# Altium PCB em32f103cb.PcbDoc
Units mm, origin at the board's own origin, x right, y up, seen from the top; angles counter-clockwise.
Board outline 37 x 30 mm, 2 copper layers (Top Layer, Bottom Layer); 44 components, 60 nets, 187 pads, 34 vias.
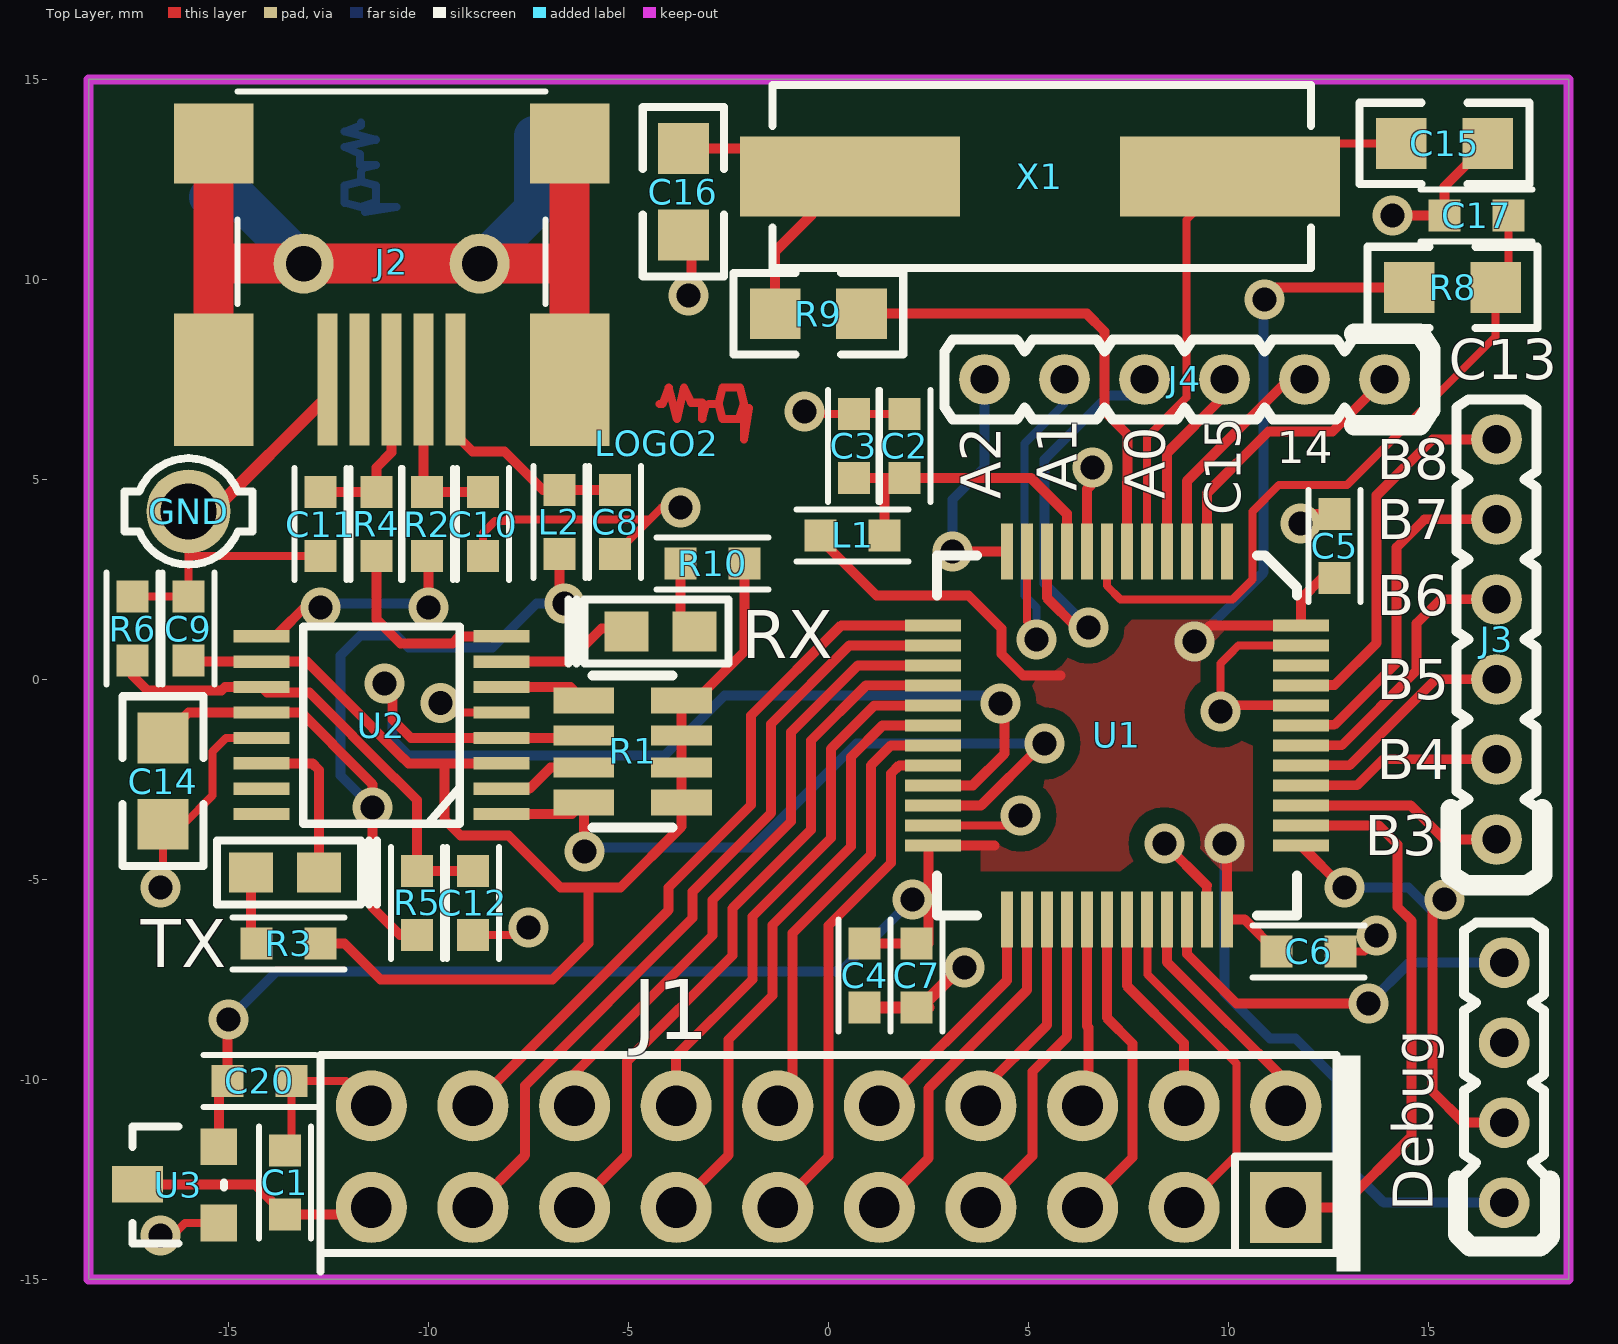
[diagram p0: Top Layer view]
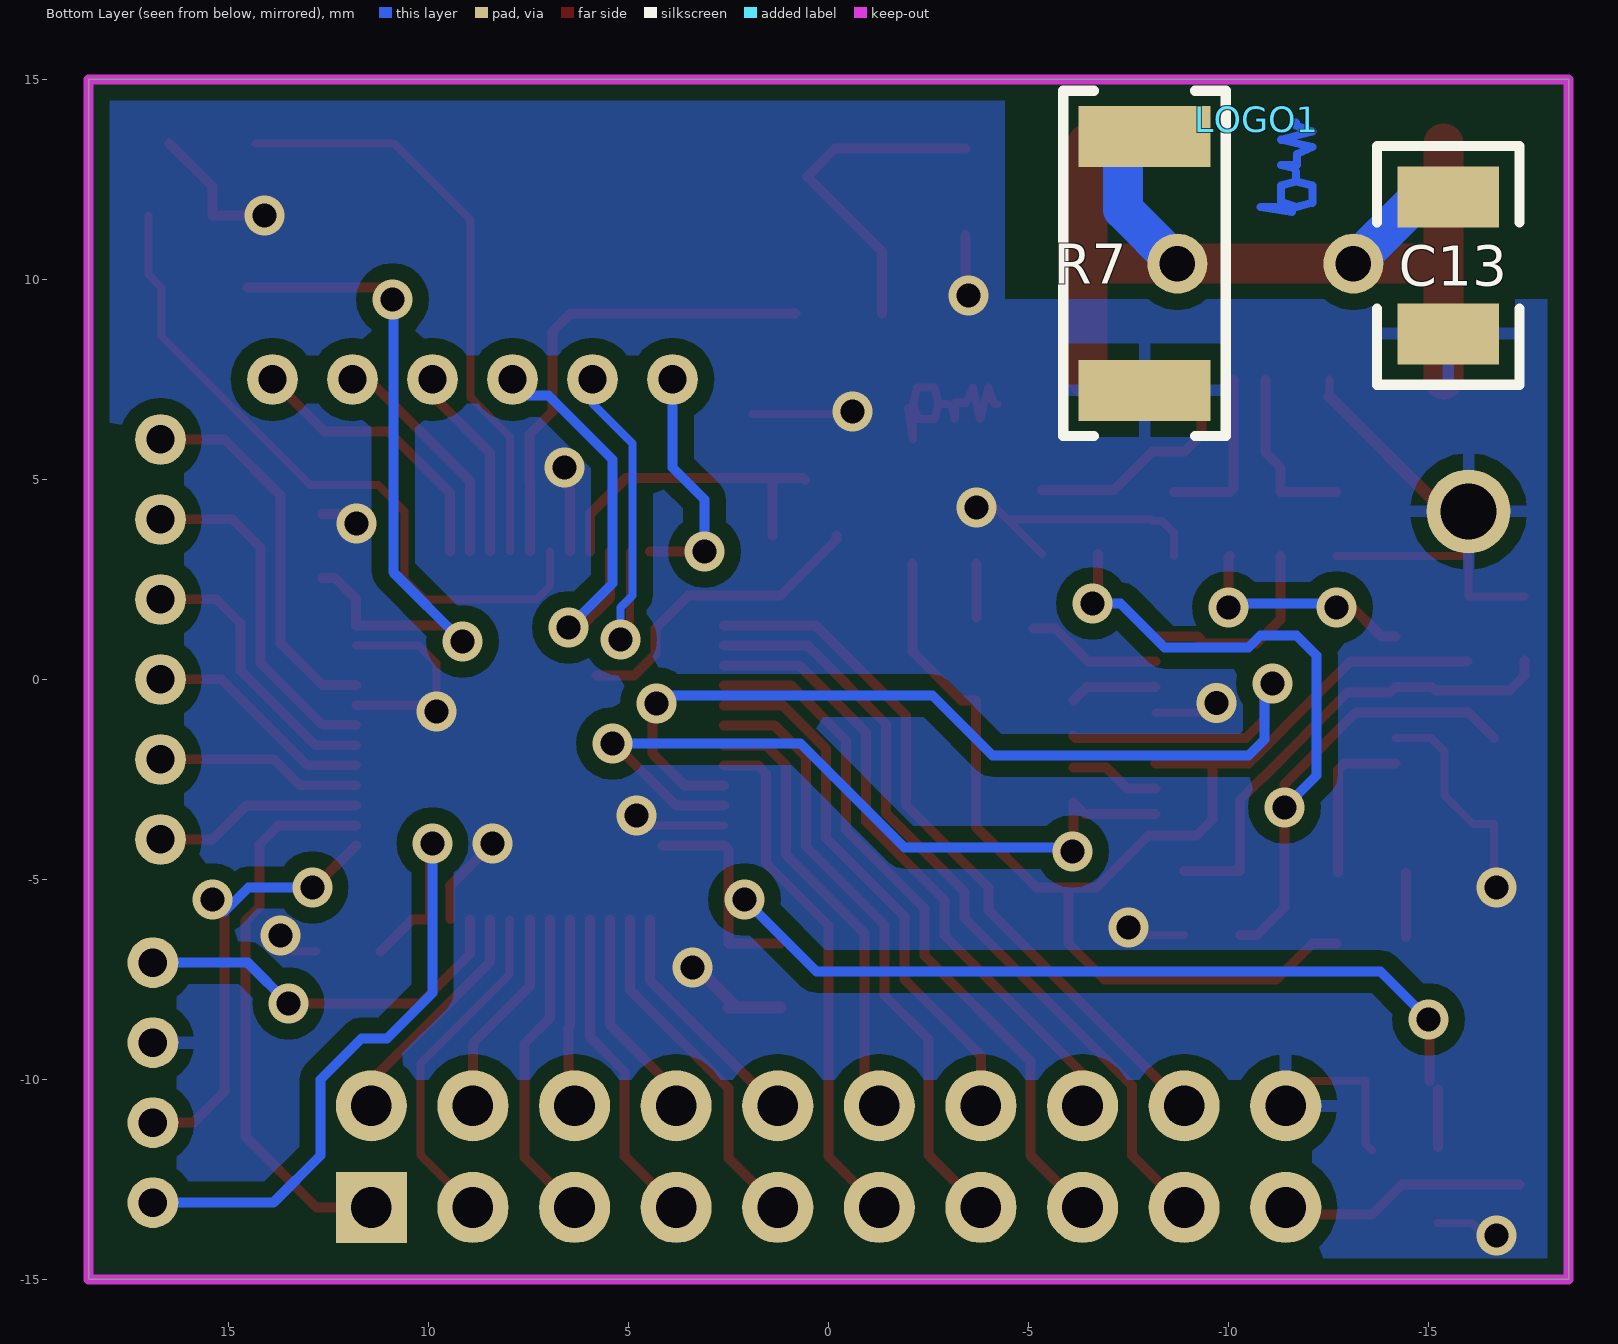
[diagram p1: Bottom Layer view, seen from below]

## Layer stack, top to bottom
Top Layer: signal copper 0.0356
Dielectric: dielectric 0.32, FR-4, Dk 4.8
Bottom Layer: signal copper 0.0356

## Board outline
-18.5,-15 -18.5,15 18.5,15 18.5,-15

## Design rules (kind name [scope] priority, off if disabled: settings)
Clearance InPolyClearance [InPoly] p1: gap=0.4
Clearance Tracks-PadsClearance [IsTrack vs IsPad] p2: gap=0.22
Clearance TracksClearance [All vs IsTrack] p3: gap=0.25
Clearance [All] p4: gap=0.2
ComponentClearance [All] p1 off: gap=0.254 collisioncheckmode=3 verticalgap=0.254 showdistances=FALSE
Height [All] p1: minheight=0 maxheight=40 prefheight=12.7
HoleSize [All] p1: absolutevalues=TRUE maxlimit=6 minlimit=0.025 maxpercent=80.000 minpercent=20.000
MinimumSolderMaskSliver [not(IsComponentPrimitive and OnSolderMask)] p1: minsoldermaskwidth=0.1
PolygonConnect PolygonConnectDirect [IsVia] p1: connectstyle=Direct reliefconductorwidth=0.254 reliefentries=4 polygonreliefangle="90 Angle"
PolygonConnect PolygonConnectElse [All] p2: connectstyle=Relief reliefconductorwidth=0.3 reliefentries=4 polygonreliefangle="90 Angle"
RoutingVias [All] p1: holewidth=0.6 width=1.1 viastyle="Through Hole" minholewidth=0.5 minwidth=1 maxholewidth=2 maxwidth=4
SilkToSilkClearance [All] p1 off: silktosilkclearance=0.254
SilkscreenOverComponentPads [All] p1: minsilkscreentomaskgap=0.1
SolderMaskExpansion [All] p1: expansion=0.102
Width [All] p1: maxlimit=4 minlimit=0.2 preferedwidth=0.3
22 further rules are at their usual default settings.

## Components (designator, comment, footprint, x,y, rotation, side; value= is the part's Value field where it differs from the comment)
C1 "CL10B105KO8NNNC" 0603-IPC -13.589,-12.573 r90 top
C2 "CL10B105KO8NNNC" 0603-IPC 1.905,5.842 r90 top
C3 "06035C103KAT2A" 0603-IPC 0.635,5.842 r90 top
C4 "CL10B105KO8NNNC" 0603-IPC 0.9,-7.4 r270 top
C5 "CL10B104JB8NNNC" 0603-IPC 12.654,3.338 r90 top
C6 "CL10B104JB8NNNC" 0603-IPC 12,-6.8 r0 top
C7 "CL10B104JB8NNNC" 0603-IPC 2.2,-7.4 r270 top
C8 "06035C103KAT2A" 0603-IPC -5.334,3.937 r90 top
C9 "CL10B104JB8NNNC" 0603-IPC -16.002,1.27 r270 top
C10 "CC0603JRNPO9BN470" 0603-IPC -8.636,3.883 r270 top
C11 "CC0603JRNPO9BN470" 0603-IPC -12.7,3.883 r270 top
C12 "06035C103KAT2A" 0603-IPC -8.89,-5.588 r90 top
C13 "MCCA000836" 1210 -15.494,12.065 r270 bottom
C14 "0805YC475KAT2A" 0805 -16.637,-2.54 r270 top
C15 "CL21C220JBANNNC" 0805 15.4,13.4 r180 top
C16 "CL21C220JBANNNC" 0805 -3.629,12.192 r90 top
C17 "CL10B104JB8NNNC" 0603-IPC 16.2,11.6 r180 top
C20 "CL10B105KO8NNNC" 0603-IPC -14.224,-10.033 r0 top
Debug "ZL303-04P" PLMS4S 16.891,-13.081 r90 top
GND "LST1506" LST1506 -16,4.2 r180 top
J1 "ZL212-20KG" PLD20R 11.43,-13.2 r180 top locked
J2 "DS1104-BN0SR" USBMS1B5 -10.922,7.493 r0 top
J3 "PLMS6S" PLMS6S 16.7,-4 r90 top
J4 "PLMS6S" PLMS6S 13.9,7.5 r180 top
L1 "BLM18AG102SN1D" 0603-IPC 0.6,3.6 r180 top
L2 "BLM18AG102SN1D" 0603-IPC -6.731,3.937 r270 top
LOGO1 "MRQ_1_8" MRQ_1_8 -10.7,14 r270 bottom
LOGO2 "MRQ_1_8" MRQ_1_8 -4.3,5.9 r0 top
R1 "4x47k" 1206RP -4.9,-1.8 r270 top
R2 "0603SAF270JT5E" 0603-IPC -10.033,3.883 r270 top
R3 "0603SAF1001T5E" 0603-IPC -13.5,-6.6 r0 top
R4 "0603SAF270JT5E" 0603-IPC -11.303,3.883 r270 top
R5 "0603WGF10KT5E" 0603-IPC -10.287,-5.588 r90 top
R6 "0603WGF15KT5E" 0603-IPC -17.399,1.27 r90 top
R7 "25121WJ 910K T5E" 2512 -7.9,10.4 r90 bottom
R8 "0805WAF 100K T5E" 0805 15.6,9.8 r0 top
R9 "0805WAF 220R T5E" 0805 -0.254,9.144 r0 top
R10 "0603SAF1001T5E" 0603-IPC -2.9,2.9 r0 top
RX "KP-1608SGC" D0603 -4.2,1.2 r180 top
TX "LED0603-RW120" D0603 -13.589,-4.826 r0 top
U1 "STM32F103CBT6" MS-026ABC 7.207,-1.397 r270 top
U2 "FT230XS" MO-137AB -11.176,-1.143 r180 top
U3 "MCP1700T3302ETT" SOT23-3 -15.24,-13.589 r90 top
X1 "8.00MHz" HC49SMP 10.033,12.573 r180 top

## Footprints (in the part's own frame and the unit in brackets; to place one, negate y for a bottom-side part, rotate by r counter-clockwise, add the part's x,y. Pads: shape width x height; smd on the part's side, far side on the other; paste and mask are expansions set on the pad)
0603-IPC [mm]
  rect 0.8x0.8 smd: 1(-0.8,0) 2(0.8,0)
  silkscreen extent -1.4,-0.65 1.4,0.65, body extent -0.8,-0.4 0.8,0.4, height 1
0805 [mil]
  rect 50x50 smd: 1(-42.5,0) 2(42.5,0)
  silkscreen extent -84,-40 84,40, body extent -39,-28 39,28, height 51
1206RP [mm]
  rect 0.65x1.524 smd: 1(-1.275,-1.219) 4(1.275,-1.219) 5(1.275,1.219) 8(-1.275,1.219)
  rect 0.5x1.524 smd: 2(-0.4,-1.219) 3(0.4,-1.219) 6(0.4,1.219) 7(-0.4,1.219)
  silkscreen extent -1.9,-1 1.9,1, body extent -1.6,-0.8 1.6,0.8, height 0.55
1210 [mil]
  rect 60x100 smd: 1(0,0) 2(135,0)
  silkscreen extent -50,-70 185,70, body extent 5,-49 130,49, height 75
2512 [mil]
  rect 60x130 smd: 1(125,0) 2(-125,0)
  silkscreen extent -170,-80 170,80, body extent -128,-63 128,63, height 26
D0603 [mm]
  rect 1.1x1 smd: ANOD(-0.85,0) CATH(0.85,0)
  silkscreen extent -1.7,-0.8 2.3,0.8, body extent -1.06,-0.7 0.94,0.7, height 1.35
HC49SMP [mm]
  rect 5.5x2 smd: 1(0,0) 2(9.5,0)
  silkscreen extent -2.03,-2.29 11.43,2.29, body extent -1.6,-2.4 11.1,2.4, height 4.2
LST1506 [mm]
  round 2.1 hole 1.4: 1(0,0)
  silkscreen extent -1.6,-1.33 1.6,1.33, body extent -1.4,-0.4 1.4,0.4, height 7
MO-137AB [mil]
  rect 55x12 smd: 1(-118,87.5) 2(-118,62.5) 3(-118,37.5) 4(-118,12.5) 5(-118,-12.5) 6(-118,-37.5) 7(-118,-62.5) 8(-118,-87.5) 9(118,-87.5) 10(118,-62.5) 11(118,-37.5) 12(118,-12.5) 13(118,12.5) 14(118,37.5) 15(118,62.5) 16(118,87.5)
  silkscreen extent -77,-97 77,97, body extent -118,-97 118,97, height 69
MRQ_1_8 [mm]
  Top Layer lines w0.203: 0.076,0.991 0.152,0.991 0.305,1.397 0.508,0.61 0.686,1.397 0.864,1.016 1.143,1.016 1.143,0.61 1.219,0.94 1.321,0.991 1.549,0.991 ; 2.311,0.889 2.184,0.102 2.184,0.991 ; 2.184,0.991 2.057,0.61 1.651,0.61 1.549,0.991 ; 2.184,0.991 2.083,1.397 1.651,1.397 1.549,0.991
MS-026ABC [mm]
  rect 1.4x0.3 smd: 1(-4.6,2.75) 2(-4.6,2.25) 3(-4.6,1.75) 4(-4.6,1.25) 5(-4.6,0.75) 6(-4.6,0.25) 7(-4.6,-0.25) 8(-4.6,-0.75) 9(-4.6,-1.25) 10(-4.6,-1.75) 11(-4.6,-2.25) 12(-4.6,-2.75) 25(4.6,-2.75) 26(4.6,-2.25) 27(4.6,-1.75) 28(4.6,-1.25) 29(4.6,-0.75) 30(4.6,-0.25) 31(4.6,0.25) 32(4.6,0.75) 33(4.6,1.25) 34(4.6,1.75) 35(4.6,2.25) 36(4.6,2.75)
  rect 0.3x1.4 smd: 13(-2.75,-4.6) 14(-2.25,-4.6) 15(-1.75,-4.6) 16(-1.25,-4.6) 17(-0.75,-4.6) 18(-0.25,-4.6) 19(0.25,-4.6) 20(0.75,-4.6) 21(1.25,-4.6) 22(1.75,-4.6) 23(2.25,-4.6) 24(2.75,-4.6) 37(2.75,4.6) 38(2.25,4.6) 39(1.75,4.6) 40(1.25,4.6) 41(0.75,4.6) 42(0.25,4.6) 43(-0.25,4.6) 44(-0.75,4.6) 45(-1.25,4.6) 46(-1.75,4.6) 47(-2.25,4.6) 48(-2.75,4.6)
  silkscreen extent -4.5,-4.5 4.5,4.5, body extent -4.6,-4.6 4.6,4.6, height 1.6
PLD20R [mil]
  rect 70x70 hole 40: 1(0,0)
  round 70 hole 40: 2(0,-100) 3(100,0) 4(100,-100) 5(200,0) 6(200,-100) 7(300,0) 8(300,-100) 9(400,0) 10(400,-100) 11(500,0) 12(500,-100) 13(600,0) 14(600,-100) 15(700,0) 16(700,-100) 17(800,0) 18(800,-100) 19(900,0) 20(900,-100)
  silkscreen extent -74,-150 950,63, body extent -50,-113 950,384, height 200
PLMS4S [mil]
  round 50 hole 28: 1(0,0) 2(78.74,0) 3(157.48,0) 4(236.22,0)
  silkscreen extent -43,-45 276,45, body extent -39,-39 276,39, height 236
PLMS6S [mil]
  round 50 hole 28: 1(0,0) 2(78.74,0) 3(157.48,0) 4(236.22,0) 5(314.96,0) 6(393.7,0)
  silkscreen extent -45,-45 433,45, body extent -39,-39 433,39, height 236
SOT23-3 [mil]
  rect 36x36 smd: 1(0,0) 2(75,0)
  rect 36x50 smd: 3(38,80)
  silkscreen extent -20,-5 95,85, body extent -22,-7 97,87, height 43
USBMS1B5 [mm]
  rect 0.5x3.3 smd: 1(1.6,0) 2(0.8,0) 3(0,0) 4(-0.8,0) 5(-1.6,0)
  rect 1.981x3.302 smd: 6(-4.45,0) 9(4.45,0)
  rect 1.981x2 smd: 7(-4.45,5.9) 8(4.45,5.9)
  round 1.5 hole 0.889: 10(-2.2,2.9) 11(2.2,2.9)
  silkscreen extent -3.85,1.9 3.85,7.21, body extent -4.95,-0.4 4.95,8.8, height 4.14

## Part data
C1 C2 C4 C20: library part CL10B105KO8NNNC[[/\]]0603[[/\]]16V[[/\]]10%[[/\]]1u/16
C3 C8 C12: library part 06035C103KAT2A[[/\]]0603[[/\]]500V[[/\]]10%[[/\]]10n/50
C5 C6 C7 C9 C17: library part CL10B104JB8NNNC[[/\]]0603[[/\]]50V[[/\]]10%[[/\]]100n/50
C10 C11: library part CC0603JRNPO9BN470[[/\]]0603[[/\]]50V[[/\]]5%[[/\]]47p/50
C13: library part MCCA000836[[/\]]1210[[/\]]1000V[[/\]]10%[[/\]]1n5/1000
C14: library part 0805YC475KAT2A[[/\]]0805[[/\]]16V[[/\]]10%[[/\]]4u7/16
C15 C16: library part CL21C220JBANNNC[[/\]]0805[[/\]]50V[[/\]]5%[[/\]]22p/50
Debug: library part ZL303-04P[[/\]]4x2mm
GND: library part LST1506[[/\]]2.8x0.8
J1: library part ZL212-20KG[[/\]]2x10x2.54
J2: library part DS1104-BN0SR[[/\]]USBMS1B5
J3 J4: library part PLMS6S[[/\]]6x2mm
L1 L2: library part BLM18AG102SN1D[[/\]]0603[[/\]]BLM18AG102SN1D
LOGO1 LOGO2: library part MRQ_1_8[[/\]]MRQLOGO
R1: library part 4D03WGJ0473T[[/\]]1206RP[[/\]]0.063W[[/\]]5%[[/\]]4x47k
R2 R4: library part 0603SAF270JT5E[[/\]]0603[[/\]]0.1W[[/\]]1%[[/\]]27R
R3 R10: library part 0603SAF1001T5E[[/\]]0603[[/\]]0.1W[[/\]]1%[[/\]]1k
R5: library part 0603WGF10KT5E[[/\]]0603[[/\]]0.1W[[/\]]1%[[/\]]10k
R6: library part 0603WGF15KT5E[[/\]]0603[[/\]]0.1W[[/\]]1%[[/\]]15k
R7: library part "25121WJ 910K T5E[[/\]]2512[[/\]]1W[[/\]]5%[[/\]]910k 5%"
R8: library part "0805WAF 100K T5E[[/\]]0805[[/\]]0.125W[[/\]]1%[[/\]]100k"
R9: library part "0805WAF 220R T5E[[/\]]0805[[/\]]0.125W[[/\]]1%[[/\]]220R"
RX: library part KP-1608SGC[[/\]]0603
TX: library part LED0603-RW120[[/\]]0603
U1: library part STM32F103CBT6[[/\]]MS-026ABC
U2: library part FT230XS[[/\]]MO-137AB
U3: library part MCP1700T3302ETT[[/\]]SOT23-3
X1: library part 8.00MHz[[/\]]HC49/4HSMX[[/\]]8.00MHz

## Via types
v1: diameter 1, hole 0.6, Top Layer to Bottom Layer, 34 vias

## Nets (pads, with @x,y where several pads share a name; then routed paths per layer and width w, separated by ;. In a path a pad name is that pad's centre, name@x,y a point inside that pad or via, vN(x,y) a via of type N, cw(c..) or ccw(c..) an arc to the next point about the centre after c; other vN are vias at no path point)
+3V3: C4.1 C5.1 C6.1 C7.1 C20.1 Debug.1 L1.2 R8.1 U1.24 U1.36 U1.48 U3.2 | length 70.6
  Top Layer w0.25: U3.2 C20.1@-15.24,-10.249 ; C20.1 -15.024,-8.524 v1(-15,-8.5) ; L1.2 -0.2,3.5 1.2,2.1 3.5,2.1 4.325,1.275 4.325,0.638 4.863,0.1 5.8,0.1 ; C4.1@1.2,-6.6 2.5,-6.6 v1@2.5,-5.5 ; v1(2.1,-5.5) v1@2.5,-5.5 ; 4.147,-4.147 U1.24 2.5,-4.254 v1@2.5,-5.5 ; v1(9.15,0.95) 9.553,1.353 U1.48 ; v1@9.957,-4.357 U1.36 10.397,-5.997 C6.1 ; v1(10.9,9.5) 11.2,9.8 R8.1 ; 10.948,1.348 11.802,1.348 U1.48 ; C5.1 12.338,2.538 11.807,2.007 U1.48
  Bottom Layer w0.25: v1(-15,-8.5) -13.8,-7.3 0.3,-7.3 v1(2.1,-5.5) ; v1(9.15,0.95) 10.88,2.68 10.88,9.48 v1(10.9,9.5) ; v1(9.9,-4.1) 9.9,-7.837 11.038,-8.975 11.675,-8.975 12.7,-10 12.7,-11.9 13.881,-13.081 Debug.1
+5V: C1.1 J1.19 U3.3 | length 6.2
  Top Layer w0.25: U3.3 -14.338,-12.624 C1.1 -11.603,-13.373 J1.19
DIAG-RXD: R1.4 U1.22 U2.1 | length 20
  Top Layer w0.25: U2.1 -6.41,-3.365 R1.4 -6.119,-4.181 -6.1,-4.2 -6.1,-4.4 v1(-6.1,-4.3) ; U1.22 3.816,-3.147 5.263,-1.7 5.4,-1.7 v1(5.4,-1.6)
  Bottom Layer w0.25: v1(-6.1,-4.3) -6.1,-4.4 -6.1,-4.2 -1.9,-4.2 0.7,-1.6 v1(5.4,-1.6)
DIAG-TXD: R1.2 U1.21 U2.4 | length 27.5
  Top Layer w0.25: v1(-11.1,-0.1) -11,-0.1 -10.9,-0.2 -10.9,-1 -10.44,-1.46 U2.4 -6.18,-1.46 R1.2 ; U1.21 3.608,-2.647 4.4,-1.855 4.4,-0.5 v1(4.3,-0.6)
  Bottom Layer w0.25: v1(-11.1,-0.1) -11,-0.1 -10.9,-0.2 -10.9,-1.5 -10.5,-1.9 -4.1,-1.9 -2.6,-0.4 4.4,-0.4 4.4,-0.5 v1(4.3,-0.6)
GND: C1.2 C2.2 C3.2 C4.2 C5.2 C6.2 C7.2 C8.1 C9.1 C10.2 C11.2 C12.1 C13.2 C14.2 C15.1 C16.1 C17.2 C20.2 Debug.3 GND.1 J1.20 J2.5 R6.2 R7.2 U1.8 U1.23 U1.35 U1.44 U1.47 U2.5 U2.13 U3.1 | length 59.8
  Top Layer w0.2: R6.2 C9.1 -16,2.072 -16,3 ; v1(-16.7,-13.9) -16.4,-13.9 -16.089,-13.589 U3.1 ; v1(-16.7,-5.2) -16.637,-5.137 C14.2 -16.12,-3.619 -15.4,-2.9 -15.4,-1.8 -15.061,-1.46 U2.13 ; GND.1@-15.4,4.2 GND.1 -16,3 ; C1.2 -13.424,-11.608 C20.2 -12.057,-10.033 J1.20 ; C11.2 -15.917,3.083 -16,3 ; J2.5@-12.522,7.078 J2.5 ; v1(-9.7,-0.586) -9.786,-0.586 -9.8,-0.6 -9.574,-0.826 U2.5 U2.5@-8.872,-0.826 ; C12.1 -7.888,-6.388 -7.7,-6.2 v1(-7.5,-6.2) ; C10.2 -8.636,3.664 -8.337,3.963 -8.103,3.963 -8.066,4 -4.471,4 ; C8.1 -4.471,4 ; v1(-3.7,4.3) -4.171,4.3 -4.471,4 ; v1(-0.6,6.7) -0.542,6.642 C2.2 ; U1.23 4.319,-3.647 4.553,-3.647 v1(4.8,-3.4) ; v1(9.8,-0.8) 9.8,0.398 10,0.598 10,0.6 10.253,0.853 U1.47 ; C6.2 13.4,-6.8 13.795,-6.405 v1(13.705,-6.405)
  Top Layer w0.24: U1.35 9.457,-5.157 ; v1@9.953,-0.647 U1.44
  Top Layer w0.25: v1(-3.5,9.6) -3.429,9.671 C16.1@-3.429,11.112 ; U1.8 6.457,4.757 6.7,5 6.7,5.1 6.6,5.2 v1(6.6,5.3) ; v1(8.4,-4.1) 9.457,-5.157 ; v1(11.8,3.9) 11.5,3.9 11.738,4.138 C5.2 ; v1(14.1,11.6) C17.2 15.4,12.321 C15.1
  Top Layer w0.3: GND.1@-15.4,4.2 J2.5@-12.522,7.078 ; C4.2@1.2,-8.2 C7.2@2.5,-8.2 ; C7.2@2.3,-8.2 3.3,-7.2 v1(3.4,-7.2) ; v1(9.8,-0.8) v1@9.953,-0.647
  Bottom Layer w0.2: v1@13.7,-6.4 v1(13.705,-6.405)
NetC2_1: C2.1 C3.1 L1.1 U1.9 | length 8.1
  Top Layer w0.25: C3.1@0.584,4.991 C3.1 1.4,5.042 ; L1.1 1.4,5.042 ; U1.9 5.957,4.143 5.058,5.042 C2.1 1.4,5.042
NetC8_2: C8.2 J2.1 L2.1 | length 5.9
  Top Layer w0.25: J2.1 -9.322,6.122 -8.9,5.7 -8.1,5.7 -7.137,4.737 L2.1 C8.2
NetC10_1: C10.1 J2.2 R2.1 | length 4.2
  Top Layer w0.25: J2.2 -10.122,4.772 R2.1 C10.1
NetC11_1: C11.1 J2.3 R4.1 | length 4.4
  Top Layer w0.25: C11.1 R4.1 -11.303,5.297 -10.922,5.678 J2.3
NetC12_2: C12.2 R5.2 R6.1 U2.11 | length 12
  Top Layer w0.25: R6.1 -17.399,0.099 -17.025,-0.275 -15.175,-0.275 -15.091,-0.191 U2.11 -14.038,-0.326 -12.974,-0.326 -11.9,-1.4 -11.9,-1.414 -10.854,-2.46 -10.84,-2.46 -10.287,-3.013 R5.2 C12.2
NetC16_2: C16.2 R9.1 X1.2 | length 8.5
  Top Layer w0.25: C16.2@-3.429,13.271 -0.165,13.271 X1.2 -1.333,10.706 R9.1
NetR2_2: R2.2 U2.9 | length 6.5
  Top Layer w0.25: U2.9 -13.82,1.079 -13,1.9 -12.9,1.8 v1(-12.7,1.8) ; R2.2 -10,3.05 v1(-10,1.8)
  Bottom Layer w0.25: v1(-12.7,1.8) -12.9,1.8 -13,1.9 -10.1,1.9 v1(-10,1.8)
NetR3_1: R3.1 TX.ANOD | length 1.6
  Top Layer w0.25: R3.1@-14.439,-6.439 TX.ANOD
NetR4_2: R4.2 U2.8 | length 5
  Top Layer w0.25: R4.2 -11.303,1.503 -10.7,0.9 -9.4,0.9 -9.22,1.079 U2.8
NetR10_1: R10.1 RX.ANOD | length 1.4
  Top Layer w0.25: RX.ANOD@-3.7,1.546 R10.1
NRST: C17.1 R8.2 U1.7 | length 17.6
  Top Layer w0.2: U1.7 6.957,2.343 7.3,2 10.1,2 10.6,2.5 10.6,4.202 11.257,4.859 12.959,4.859 16.679,8.579 R8.2 17,10.121 C17.1
OSC_IN: C15.2 U1.5 X1.1 | length 14.9
  Top Layer w0.2: U1.5 7.957,6.057 8.945,7.045 8.945,11.485 X1.1 10.86,13.4 C15.2
OSC_OUT: R9.2 U1.6 | length 12
  Top Layer w0.25: R9.2 6.456,9.144 6.9,8.7 6.9,6.7 7.475,6.125 7.475,4.938 7.457,4.92 U1.6
PA0: J4.4 U1.10 | length 10
  Top Layer w0.25: U1.10 5.457,2.043 6.2,1.3 v1(6.5,1.3)
  Bottom Layer w0.25: v1(6.5,1.3) 5.4,2.4 5.4,5.5 7,7.1 J4.4@7.6,7.1
PA1: J4.5 U1.11 | length 9.4
  Top Layer w0.2: U1.11 4.957,1.443 5.3,1.1 v1(5.2,1)
  Bottom Layer w0.2: v1(5.2,1) 5.2,1.8 4.9,2.1 4.9,5.9 5.9,6.9 J4.5
PA2: J4.6 U1.12 | length 6
  Top Layer w0.25: v1(3.1,3.2) 3.103,3.203 U1.12
  Bottom Layer w0.25: v1(3.1,3.2) 3.1,4.5 3.9,5.3 J4.6
PA3: J1.18 U1.13 | length 18.2
  Top Layer w0.25: J1.18@-8.802,-10.66 J1.18 -4,-5.77 -4,-5.2 -1.938,-3.138 -1.938,-0.904 0.319,1.353 U1.13
PA4: J1.17 U1.14 | length 20
  Top Layer w0.25: J1.17 -7.584,-11.894 -7.584,-10.149 -3.4,-5.965 -3.4,-5.307 -1.438,-3.345 -1.438,-1.111 0.526,0.853 U1.14
PA5: J1.16 U1.15 | length 15.8
  Top Layer w0.25: J1.16 -6.35,-9.85 -2.9,-6.4 -2.9,-5.514 -0.938,-3.552 -0.938,-1.319 0.734,0.353 U1.15
PA6: J1.15 U1.16 | length 17.7
  Top Layer w0.25: J1.15 -5.044,-11.894 -5.044,-9.544 -2.4,-6.9 -2.4,-5.721 -0.438,-3.759 -0.438,-1.526 0.941,-0.147 U1.16
PA7: J1.14 U1.17 | length 13.5
  Top Layer w0.25: J1.14 -3.81,-9.41 -1.9,-7.5 -1.9,-5.928 0.062,-3.966 0.062,-1.733 1.148,-0.647 U1.17
PA8: J1.6 U1.29 | length 4.7
  Top Layer w0.25: J1.6 6.5,-10.51 6.5,-8.707 6.457,-8.664 6.457,-8.071 6.457,-6.507 U1.29
PA9: J1.5 U1.30 | length 8
  Top Layer w0.25: J1.5 7.6,-11.95 7.6,-9.1 6.957,-8.457 6.957,-7.864 6.957,-6.714 U1.30
PA10: J1.4 U1.31 | length 5.3
  Top Layer w0.25: U1.31 7.457,-6.921 7.457,-7.657 8.89,-9.09 J1.4
PA11: J1.3 U1.32 | length 8.7
  Top Layer w0.2: U1.32 7.975,-6.015 7.975,-7.375 10.2,-9.6 10.2,-11.89 J1.3
PA12: J1.2 U1.33 | length 5.9
  Top Layer w0.25: U1.33 8.457,-7.064 9.993,-8.6 10,-8.6 11.43,-10.03 J1.2
PA15: J1.1 U1.38 | length 13.9
  Top Layer w0.25: J1.1 12.8,-13.2 14.58,-11.42 14.58,-6.042 14.225,-5.688 14.225,-4.125 13.747,-3.647 U1.38
PB0: J1.13 U1.18 | length 15.4
  Top Layer w0.25: J1.13 -2.504,-11.894 -2.504,-9.004 -1.4,-7.9 -1.4,-6.136 0.562,-4.174 0.562,-1.94 1.355,-1.147 U1.18
PB1: J1.12 U1.19 | length 11.2
  Top Layer w0.25: J1.12 -0.9,-10.29 -0.9,-6.343 1.062,-4.381 1.062,-2.147 1.562,-1.647 U1.19
PB2: J1.11 U1.20 | length 13.1
  Top Layer w0.25: J1.11 0,-11.93 0,-6.15 1.562,-4.588 1.562,-2.354 1.769,-2.147 U1.20
PB3: J3.1 U1.39 | length 5.2
  Top Layer w0.25: U1.39 14.547,-3.147 15.4,-4 J3.1
PB4: J3.2 U1.40 | length 5.2
  Top Layer w0.24: U1.40 13.217,-2.647 13.864,-2 J3.2
PB5: J3.3 U1.41 | length 5.8
  Top Layer w0.24: U1.41 13.024,-2.147 15.171,0 J3.3
PB6: J3.4 U1.42 | length 7.1
  Top Layer w0.24: U1.42 12.831,-1.647 14.7,0.222 14.7,1.4 15.3,2 J3.4
PB7: J3.5 U1.43 | length 8.7
  Top Layer w0.24: U1.43 11.817,-1.137 12.648,-1.137 14.2,0.415 14.2,3.3 14.9,4 J3.5
PB8: J3.6 U1.45 | length 9.6
  Top Layer w0.25: U1.45 11.812,-0.142 12.65,-0.142 13.705,0.913 13.705,4.605 15.1,6 J3.6
PB9: U1.46
PB12: J1.10 U1.25 | length 6
  Top Layer w0.25: J1.10 1.328,-10.66 4.457,-7.531 U1.25
PB13: J1.9 U1.26 | length 8.7
  Top Layer w0.25: J1.9 2.504,-11.966 2.504,-10.221 4.957,-7.768 U1.26
PB14: J1.8 U1.27 | length 5.3
  Top Layer w0.25: J1.8 3.81,-10.29 5.457,-8.643 5.457,-8.485 U1.27
PB15: J1.7 U1.28 | length 8.1
  Top Layer w0.25: J1.7 5.1,-11.91 5.1,-9.8 5.957,-8.943 5.957,-8.278 5.957,-6.3 U1.28
PC13: J4.1 U1.2 | length 7.1
  Top Layer w0.25: U1.2@9.462,3.198 U1.2 9.457,4.657 11,6.2 12.6,6.2 J4.1
PC14: J4.2 U1.3 | length 5.8
  Top Layer w0.25: U1.3 8.957,4.957 11.5,7.5 J4.2
PC15: J4.3 U1.4 | length 4.9
  Top Layer w0.25: U1.4 8.457,5.657 9.9,7.1 J4.3
PGND: C13.1 J2.6 J2.7 J2.8 J2.9 J2.10 J2.11 R7.1 | length 27.6
  Top Layer w1: J2.6 -15.372,10.4 ; J2.7 -15.372,10.4 ; J2.9 -6.472,10.5 ; J2.8 -6.472,10.5 ; -15.372,10.4 -15.365,10.393 J2.10 J2.11 -6.579,10.393 -6.472,10.5
  Bottom Layer w1: C13.1 -14.794,12.065 J2.10 ; J2.11 -7.366,11.749 R7.1@-7.366,13.589
SWCLK: Debug.2 U1.37 | length 11.4
  Top Layer w0.25: U1.37 12.86,-5.2 v1(12.9,-5.2) ; v1(15.4,-5.5) 15.1,-5.8 15.1,-10.3 15.881,-11.081 Debug.2
  Bottom Layer w0.25: v1(12.9,-5.2) 14.5,-5.2 15.1,-5.8 v1(15.4,-5.5)
SWDIO: Debug.4 U1.34 | length 9.7
  Top Layer w0.25: U1.34 8.962,-6.002 8.962,-6.862 10.2,-8.1 v1(13.5,-8.1)
  Bottom Layer w0.25: v1(13.5,-8.1) 14.519,-7.081 Debug.4
USB-CBUS1: TX.CATH U2.14 | length 4.1
  Top Layer w0.25: U2.14 -12.905,-2.095 -12.739,-2.261 TX.CATH
USB-CBUS2: RX.CATH U2.7 | length 3.4
  Top Layer w0.25: U2.7 -6.502,0.445 -5.676,1.27 RX.CATH@-5.12,1.27
USB-CBUS3: U2.16
USB-CTS: R1.1 U2.6 | length 2.2
  Top Layer w0.25: U2.6 -6.454,-0.191 R1.1
USB-RTS: R1.3 U2.2 | length 2.3
  Top Layer w0.25: U2.2 -7.475,-2.73 -6.944,-2.2 R1.3
USB-VBUS: C14.1 L2.2 R5.1 U2.12 | length 22.9
  Top Layer w0.25: C14.1 -16.002,-0.826 U2.12 -13.182,-0.826 -12.4,-1.607 -12.4,-1.621 -11.4,-2.621 v1(-11.4,-3.2) -11.4,-5.7 -10.712,-6.388 R5.1 ; L2.2 -6.731,2.131 -6.6,2 v1(-6.6,1.9)
  Bottom Layer w0.25: v1@-11.5,-3.2 v1(-11.4,-3.2) ; v1@-11.4,-2.9 v1(-11.4,-3.2) ; v1(-6.6,1.9) -7.3,1.9 -8.4,0.8 -10.5,0.8 -10.8,1.1 -11.7,1.1 -12.2,0.6 -12.2,-2.4 v1(-11.4,-3.2)
USB-VCCIO: C9.2 R1.5 R1.6 R1.7 R1.8 R3.2 R10.2 U2.3 U2.10 | length 33.8
  Top Layer w0.25: C9.2@-15.977,0.445 U2.10 -13.037,0.445 -11.4,-1.193 -11.4,-1.207 -10.647,-1.96 -10.632,-1.96 -10.497,-2.095 -9.6,-2.095 ; R3.2 -12.1,-6.6 -11.2,-7.5 -7.763,-7.5 -6.9,-7.5 -6,-6.6 -6,-5.2 ; U2.3 -9.6,-2.095 ; R10.2 -2.1,0.7 -3.325,-0.525 R1.8 R1.7 R1.6 R1.5 -3.681,-3.681 -5.2,-5.2 -6,-5.2 ; -9.6,-2.095 -9.6,-3.5 -9.2,-3.9 -8,-3.9 -6.7,-5.2 -6,-5.2
VBAT: U1.1
pads on no net: J2.4 U2.15

## Polygon pours and split planes (outlines as drawn)
+3V3 on Top Layer "3V3Top" (solid, remove dead copper, pour order 1000): 3.8,2 10.6,2 10.6,-4.8 3.8,-4.8
GND on Bottom Layer "GNDbot" (solid, remove dead copper, pour order 1001): -4.4,15 18.5,15 18.5,-15 -18.5,-15 -18.5,9.5 -4.4,9.5

## Keep-outs
Keep-Out Layer:
  the board outline again, w0.25

## Silkscreen, mask and mechanical layers (free items; w line width, h text height)
Top Overlay:
  text "C13" at 15.5,7.5 h1
  text "14" at 11.2,5.4 h0.8
  text "B8" at 13.7,5 h1
  text "A1" at 6.2,4.7 h1 r90
  text "A2" at 4.3,4.5 h1 r90
  text "A0" at 8.4,4.5 h1 r90
  text "C15" at 10.3,4.1 h0.9 r90
  text "B7" at 13.7,3.5 h1
  text "B6" at 13.7,1.6 h1
  text "B5" at 13.7,-0.5 h1
  text "B4" at 13.7,-2.5 h1
  text "B3" at 13.4,-4.4 h1
Obrys:
  the board outline again, w0.254

## Dimensions
-18.5,-15 to -18.5,15 on Dims
-18.5,-15 to 18.5,-15 on Dims